# EAGLE board ATmega328p (EAGLE 8.6.1)
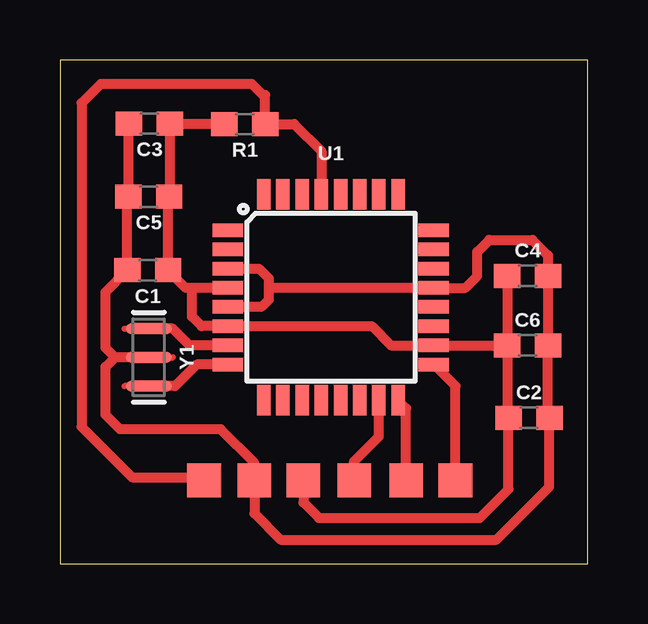
[diagram p0: board, top side]

Size 22 x 21 mm. Coordinates in mm from the lower left corner, seen from the top.
Outline: 0,0 22,0 22,21 0,21 0,0
Copper layers (1*16): Top 0.035mm / dielectric 1.5mm / Bottom 0.035mm
Design rules "OthermillDRC_1_64_v2": minimum track width 16mil, minimum drill 31mil, track to track 0.39878125mm, track to pad 0.39878125mm, pad to pad 0.39878125mm, via to via 0.39878125mm, smd to smd 0mil, copper to edge 0mil, drill to drill 1mil, minimum pad ring 0mil, minimum via ring 15mil, stop-mask expansion 1mil, vias tented up to drill 30mil, thermal gap 10mil

## Footprints (pad centres in the part's own frame; a part is rotated, then mirrored left to right if it is on the bottom)
0603 = smd 1.1 x 1: 1 -0.85,0; 2 0.85,0
TP14SQ = smd 1.4 x 1.4: TP 0,0
TQFP32-08 = smd 1.27 x 0.559: 1 -4.293,2.8; 2 -4.293,2; 3 -4.293,1.2; 4 -4.293,0.4; 5 -4.293,-0.4; 6 -4.293,-1.2; 7 -4.293,-2; 8 -4.293,-2.8; 17 4.293,-2.8; 18 4.293,-2; 19 4.293,-1.2; 20 4.293,-0.4; 21 4.293,0.4; 22 4.293,1.2; 23 4.293,2; 24 4.293,2.8 | smd 0.559 x 1.27: 9 -2.8,-4.293; 10 -2,-4.293; 11 -1.2,-4.293; 12 -0.4,-4.293; 13 0.4,-4.293; 14 1.2,-4.293; 15 2,-4.293; 16 2.8,-4.293; 25 2.8,4.293; 26 2,4.293; 27 1.2,4.293; 28 0.4,4.293; 29 -0.4,4.293; 30 -1.2,4.293; 31 -2,4.293; 32 -2.8,4.293
RESONATOR-SMD-3.2X1.3 = smd 0.45 x 1.905: 1 -1.2,0; 2 0,0; 3 1.2,0

## Placement (x,y rotation side)
C1  0.1uF  [0603]  3.66,12.23 180 top
C2  4.7uF  [0603]  19.56,6.08 0 top
C3  4.7uF  [0603]  3.73,18.35 180 top
C4  4.7uF  [0603]  19.5,12 0 top
C5  4.7uF  [0603]  3.7,15.3 180 top
C6  0.1uF  [0603]  19.5,9.1 0 top
GND  TPSTP14SQ  [TP14SQ]  8.11,3.47 0 top
MISO  TPSTP14SQ  [TP14SQ]  14.43,3.47 0 top
MOSI  TPSTP14SQ  [TP14SQ]  12.27,3.47 0 top
R1  10k  [0603]  7.71,18.33 180 top
RESET  TPSTP14SQ  [TP14SQ]  6.01,3.47 0 top
SCK  TPSTP14SQ  [TP14SQ]  16.49,3.47 0 top
U1  ATMEGA328P_TQFP  [TQFP32-08]  11.3,11.1 0 top
VCC  TPSTP14SQ  [TP14SQ]  10.15,3.47 0 top
Y1  16MHz  [RESONATOR-SMD-3.2X1.3]  3.7,8.6 270 top

## Library data of the parts
C1 C6 = SparkFun-Capacitors; PROD_ID: CAP-08604
C2-C5 = SparkFun-Capacitors; PROD_ID: CAP-08280
GND MISO MOSI RESET SCK VCC = testpad
R1 = SparkFun-Resistors; PROD_ID: RES-00824
U1 = SparkFun-IC-Microcontroller; PROD_ID: IC-09069
Y1 = SparkFun-Clocks; PROD_ID: XTAL-08900

## Nets
GND: C1.2 C2.2 C3.2 C4.2 C5.2 C6.2 GND.TP U1.3 U1.5 U1.21 Y1.2
MISO: MISO.TP U1.16
MOSI: MOSI.TP U1.15
N$2: U1.7 Y1.1
N$3: U1.8 Y1.3
RESET: R1.1 RESET.TP U1.29
SCK: SCK.TP U1.17
VCC: C1.1 C2.1 C3.1 C4.1 C5.1 C6.1 R1.2 U1.4 U1.6 U1.18 VCC.TP

## Tracks (layer width: path | path; a pad name or v marks a point on that pad's centre or on a via)
GND
  Top 0.406: U1.3 8.3,12.3 8.7,11.9 8.7,11.5 | 8.7,11.5 8.7,11 8.4,10.7 U1.5 | 8.7,11.5 U1.21 16.9,11.5 17.4,12 17.4,13 17.9,13.5 19.7,13.5 20.35,12.85 C4.2 C6.2 20.35,6.14 C2.2 20.4,3.2 18.2,1 9.2,1 8.11,2.09 GND.TP 8.11,4.19 6.7,5.6 2.5,5.6 1.9,6.2 1.9,8.2 2.3,8.6 | C3.2 2.85,18.32 C5.2 2.81,15.26 C1.2 1.9,11.32 1.9,9 2.3,8.6 | Y1.2 2.3,8.6
MISO
  Top 0.406: MISO.TP 14.43,6.48 U1.16
MOSI
  Top 0.406: MOSI.TP 12.27,4.27 13.3,5.3 U1.15
N$2
  Top 0.406: U1.7 5.4,9.1 4.7,9.8 Y1.1
N$3
  Top 0.406: U1.8 5.7,8.3 4.8,7.4 Y1.3
RESET
  Top 0.406: U1.29 10.9,17.2 9.77,18.33 R1.1 8.56,19.54 8.46,19.54 8,20 1.7,20 0.9,19.2 0.9,5.7 3,3.6 5.88,3.6 RESET.TP
SCK
  Top 0.406: SCK.TP 16.49,7.4 U1.17
VCC
  Top 0.406: U1.4 5.5,11.5 | 5.5,11.5 5.24,11.5 C1.1 4.51,15.26 C5.1 4.58,15.33 C3.1 4.6,18.33 R1.2 | 5.5,11.5 5.5,10.3 5.9,9.9 U1.6 13,9.9 13.8,9.1 U1.18 C6.1 | C4.1 C6.1 | C6.1 18.65,6.14 C2.1 | C2.1 | VCC.TP 10.15,2.55 10.8,1.9 17.5,1.9 18.7,3.1 C2.1